# Altium PCB v0.2 PCb.PcbDoc
Units mm, origin at the board's own origin, x right, y up, seen from the top; angles counter-clockwise.
Board outline 61.59 x 36.58 mm, 2 copper layers (Top Layer, Bottom Layer); 41 components, 25 nets, 144 pads, 36 vias.
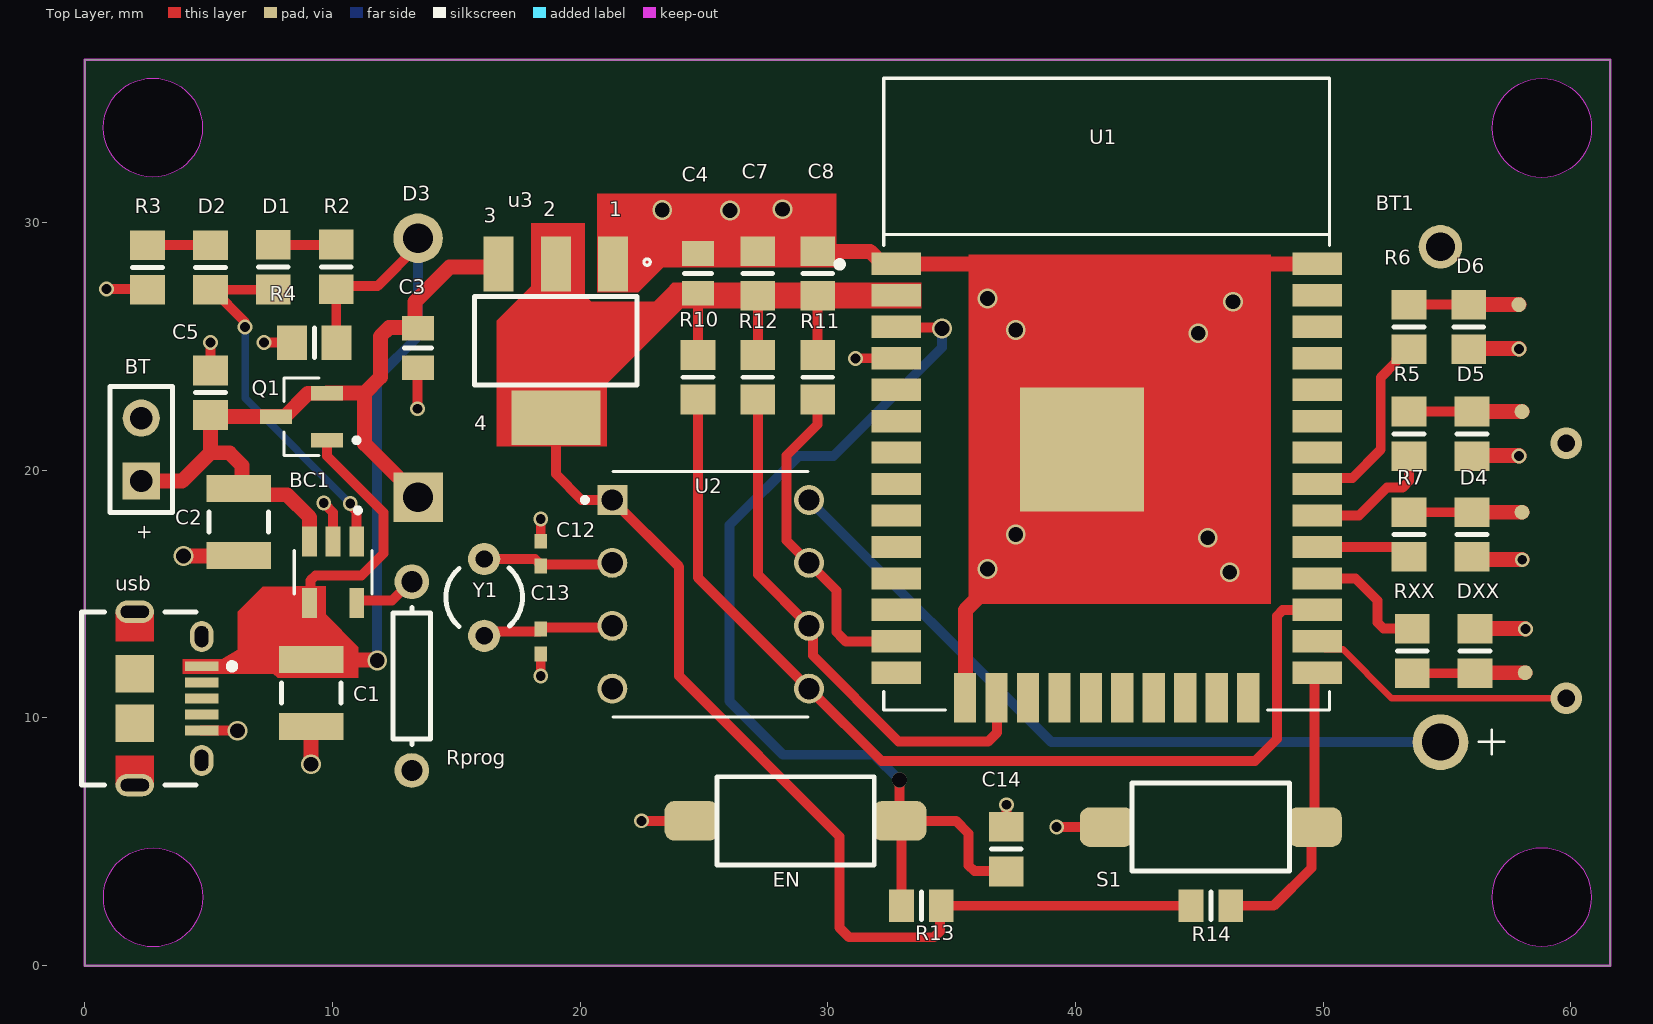
[diagram p0: Top Layer view]
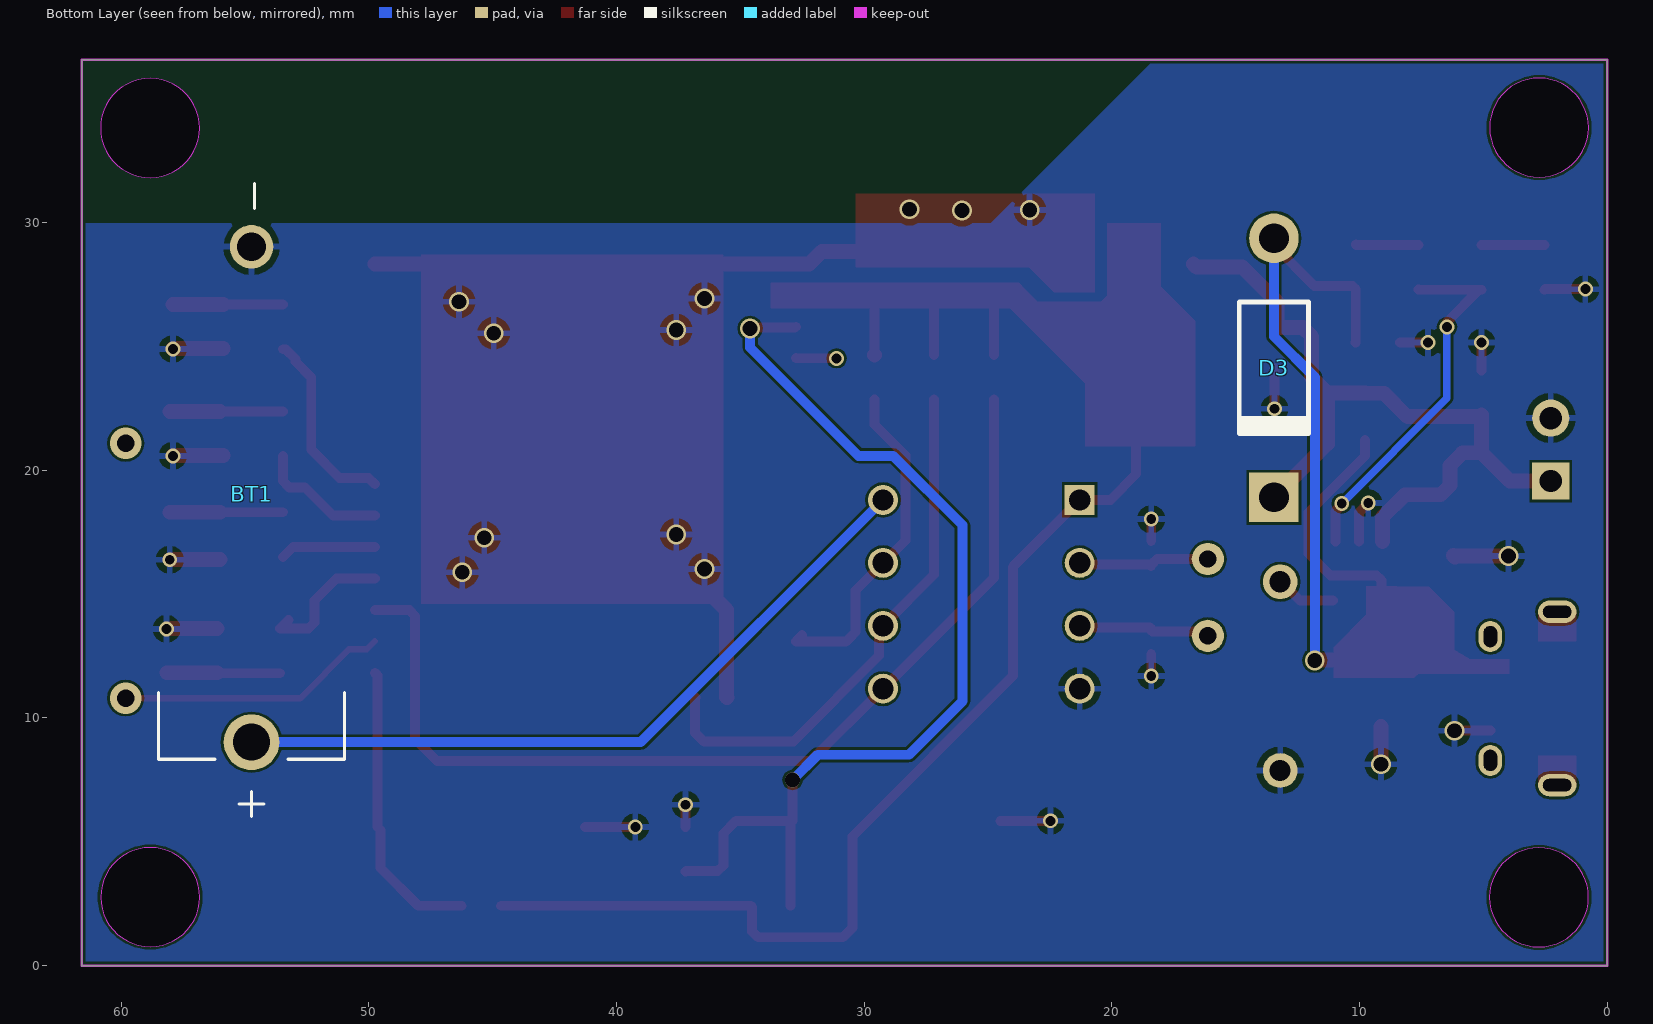
[diagram p1: Bottom Layer view, seen from below]

## Layer stack, top to bottom
Top Solder: solder mask 0.0102, Solder Resist, Dk 3.5
Top Layer: signal copper 0.0356
Dielectric 1: dielectric 0.32, FR-4, Dk 4.8
Bottom Layer: signal copper 0.0356
Bottom Solder: solder mask 0.0102, Solder Resist, Dk 3.5

## Board outline
0,0 0,36.576 61.595,36.576 61.595,0
cut-out: 2.755,31.826 cw(c2.755,33.826) 0.755,33.826 cw(c2.755,33.826) 2.755,35.826 cw(c2.755,33.826) 4.755,33.826 cw(c2.755,33.826)
cut-out: 2.763,0.752 cw(c2.763,2.752) 0.763,2.752 cw(c2.763,2.752) 2.763,4.752 cw(c2.763,2.752) 4.763,2.752 cw(c2.763,2.752)
cut-out: 58.826,0.762 cw(c58.826,2.762) 56.826,2.762 cw(c58.826,2.762) 58.826,4.762 cw(c58.826,2.762) 60.826,2.762 cw(c58.826,2.762)
cut-out: 58.833,31.811 cw(c58.833,33.811) 56.833,33.811 cw(c58.833,33.811) 58.833,35.811 cw(c58.833,33.811) 60.833,33.811 cw(c58.833,33.811)

## Design rules (kind name [scope] priority, off if disabled: settings)
Clearance [All] p1: gap=0.1 ignorepadtopadclearanceinfootprint=FALSE except(0.14: Arc-Arc Arc-Track Track-Track)
PolygonConnect [All] p1: connectstyle=Relief reliefconductorwidth=0.254 reliefentries=4 polygonreliefangle="90 Angle" airgapwidth=0.254
RoutingVias [All] p1: holewidth=0.6 width=0.6 viastyle="Through Hole" minholewidth=0.2 minwidth=0.4 maxholewidth=4 maxwidth=5
SolderMaskExpansion [All] p1: expansion=0.102 istentingtop=FALSE
UnRoutedNet [All] p1: checkbadconnections=TRUE
Width [All] p1: maxlimit=2 minlimit=0.1 preferedwidth=0.4
29 further rules are at their usual default settings.

## Components (designator, comment, footprint, x,y, rotation, side; value= is the part's Value field where it differs from the comment)
BC1 "MCP73811T-420I/OT" *SOT95P280X145-5N 10.033,15.875 r270 top
BT "Battery" BAT-2 2.286,20.828 r90 top
BT1 "BS-7" *BAT_BS-7_BS-7(Primary) 54.737,19.017 r270 bottom locked
C1 "Cap" 14-1210 9.144,11.002 r270 top value=4.7uF
C2 "Cap" 14-1210 6.223,17.907 r90 top value=4.7uF
C3 "Cap" 6-0805_L 13.462,24.93 r90 top value="1uF 25v"
C4 "Cap" 6-0805_L 24.765,27.94 r90 top value="1uF 25 v"
C5 "Cap" 6-0805_N 5.08,23.125 r90 top value=100nF
C7 "Cap" 6-0805_N 27.178,27.94 r90 top value="1 uF 10v"
C8 "Cap" 6-0805_N 29.591,27.94 r90 top value="100uF 6.3v"
C12 "Cap Semi" 0402 18.415,16.629 r270 top value=22pF
C13 "Cap Semi" 0402 18.415,13.081 r90 top value=22pF
C14 "Cap" 6-0805_N 37.211,4.699 r270 top value="1nF 50v"
D1 "LEDK" 6-0805_N 7.62,28.194 r270 top
D2 "LEDY" 6-0805_N 5.08,28.183 r90 top
D3 "D Schottky" DO-41 13.462,24.13 r270 bottom
D4 "LED1" 6-0805_N 56.007,17.399 r270 top
D5 "LED2" 6-0805_N 56.007,21.463 r270 top
D6 "LED3" 6-0805_N 55.88,25.781 r270 top
DXX "LED0" 6-0805_N 56.134,12.7 r90 top
EN "SW-PB" "TE FSMSMTR" 28.702,5.842 r90 top (schematic designator S2)
Q1 "IRLML6402TRPBF" *SOT95P237X112-3N 8.754,22.159 r180 top
R2 "Res1" 6-0805_N 10.16,28.205 r90 top value=470
R3 "Res1" 6-0805_N 2.54,28.183 r90 top value=470
R4 "Res1" 6-0805_N 9.271,25.146 r180 top value=100K
R5 "Res1" 6-0805_N 53.467,21.463 r270 top value=330
R6 "Res1" 6-0805_N 53.467,25.781 r270 top value=330
R7 "Res1" 6-0805_N 53.467,17.399 r270 top value=330
R10 "Res1" 6-0805_N 24.765,23.749 r270 top value=4.7K
R11 "Res1" 6-0805_N 29.591,23.749 r270 top value=4.7K
R12 "Res1" 6-0805_N 27.178,23.749 r270 top value=4.7K
R13 "Res1" 6-0805_L 33.782,2.413 r0 top value=10K
R14 "Res1" 6-0805_L 45.466,2.413 r180 top value=10K
Rprog "Res1" AXIAL-0.3 13.208,11.684 r270 top value=4.7K
RXX "Res1" 6-0805_N 53.594,12.7 r90 top value=330
S1 "SW-PB" "TE FSMSMTR" 45.466,5.588 r270 top
U1 "ESP32-WROOM-32D" *MODULE_ESP32-WROOM-32D 41.259,23.068 r0 top locked
U2 "DS1302Z+" DIP794W47P254L991H457Q8 25.273,14.986 r0 top
u3 "ams1117-3v3" *SOT223 19.025,25.222 r270 top
usb "10118194-0001LF" "usb b micro" 3.374,10.78 r270 top
Y1 "XTAL" R38 16.129,14.859 r180 top

## Footprints (in the part's own frame and the unit in brackets; to place one, negate y for a bottom-side part, rotate by r counter-clockwise, add the part's x,y. Pads: shape width x height; smd on the part's side, far side on the other; paste and mask are expansions set on the pad)
6-0805_L [mm] "Chip Resistor, Body 2.0x1.2mm, IPC High Density"
  rect 1x1.3 smd: 1(-0.8,0) 2(0.8,0)
  silkscreen extent 0,-0.55 0,0.55, body extent -1.07,-0.7 1.07,0.7, height 0.7
6-0805_N [mm] "Chip Resistor, Body 2.0x1.2mm, IPC Medium Density"
  rect 1.2x1.4 smd: 1(-0.9,0) 2(0.9,0)
  silkscreen extent 0,-0.6 0,0.6, body extent -1.07,-0.7 1.07,0.7, height 0.7
14-1210 [mm] "Chip Resistor, Body 3.2x2.5mm, IPC High Density"
  rect 1.1x2.6 smd: 1(-1.35,0) 2(1.35,0)
  silkscreen extent -0.4,-1.2 0.4,1.2, body extent -1.68,-1.32 1.68,1.32, height 0.9
0402 [mm] "Chip Capacitor, Body 1.0x0.5mm, IPC High Density"
  rect 0.6x0.5 smd: 1(-0.5,0) 2(0.5,0)
  body extent -0.55,-0.3 0.55,0.3, height 1.3
*BAT_BS-7_BS-7(Primary) [mm]
  round 1.755 hole 1.17: NEG(-10,0)
  round 2.25 hole 1.5: POS(10,0)
  silkscreen extent -12.56,-3.75 13,3.75
*MODULE_ESP32-WROOM-32D [mm]
  rect 2x0.9 smd: 1(-8.5,5.26) 2(-8.5,3.99) 3(-8.5,2.72) 4(-8.5,1.45) 5(-8.5,0.18) 6(-8.5,-1.09) 7(-8.5,-2.36) 8(-8.5,-3.63) 9(-8.5,-4.9) 10(-8.5,-6.17) 11(-8.5,-7.44) 12(-8.5,-8.71) 13(-8.5,-9.98) 14(-8.5,-11.25) 25(8.5,-11.25) 26(8.5,-9.98) 27(8.5,-8.71) 28(8.5,-7.44) 29(8.5,-6.17) 30(8.5,-4.9) 31(8.5,-3.63) 32(8.5,-2.36) 33(8.5,-1.09) 34(8.5,0.18) 35(8.5,1.45) 36(8.5,2.72) 37(8.5,3.99) 38(8.5,5.26)
  rect 0.9x2 smd: 15(-5.715,-12.25) 16(-4.445,-12.25) 17(-3.175,-12.25) 18(-1.905,-12.25) 19(-0.635,-12.25) 20(0.635,-12.25) 21(1.905,-12.25) 22(3.175,-12.25) 23(4.445,-12.25) 24(5.715,-12.25)
  rect 5x5 smd: 39(-1,-2.24)
  silkscreen extent -10.88,-12.75 9,12.75, body extent -8.98,-12.7 9.02,12.8, height 3.25
*SOT95P237X112-3N [mm]
  rect 1.3x0.59 smd: 1(-1.025,0.95) 2(-1.025,-0.95) 3(1.025,0)
  silkscreen extent -2.32,-1.57 0.7,1.57
*SOT95P280X145-5N [mm]
  rect 1.22x0.6 smd: 1(-1.245,0.95) 2(-1.245,0) 3(-1.245,-0.95) 4(1.245,-0.95) 5(1.245,0.95)
  silkscreen extent -2.6,-1.57 0.88,1.57
*SOT223 [mil]
  rect 88x48 smd: 1(-122,91) 2(-122,0) 3(-122,-91)
  rect 86.61x141.73 smd: 4(122.01,0)
  silkscreen extent -130,-129 70,150
AXIAL-0.3 [mm] "Axial Device, Thru-Hole; 2 Leads; 0.3 in Pin Spacing"
  round 1.4 hole 0.85: 1(-3.81,0) 2(3.81,0)
  silkscreen extent -2.77,-0.76 2.77,0.76
BAT-2 [mm] "Battery; 2 Leads"
  rect 1.5x1.5 hole 0.9: 1(-1.27,0)
  round 1.5 hole 0.9: 2(1.27,0)
  silkscreen extent -2.54,-1.27 2.54,1.27
DIP794W47P254L991H457Q8 [mm]
  rect 1.21x1.21 hole 0.86: 1(-3.97,3.81)
  round 1.21 hole 0.86: 2(-3.97,1.27) 3(-3.97,-1.27) 4(-3.97,-3.81) 5(3.97,-3.81) 6(3.97,-1.27) 7(3.97,1.27) 8(3.97,3.81)
  silkscreen extent -5.17,-4.95 3.94,4.95
DO-41 [mm] "Diode, Axial; Body 5.2 x 2.7 mm (LxDia. max), Lead Dia. 0.86 mm (max)"
  round 2 hole 1.2: 1(-5.23,0)
  rect 2x2 hole 1.2: 2(5.23,0)
  silkscreen extent -2.65,-1.4 2.75,1.4
R38 [mm] "Crystal, Thru-Hole; 2 Leads; Body 3.1 x 8.2 mm (Dia.xH)"
  round 1.3 hole 0.7: 1(0,1.55) 2(0,-1.55)
  silkscreen extent -1.55,-1.19 1.55,1.17
"TE FSMSMTR" [mm]
  rrect50% 1.6x2.19 smd: 1(0,4.191) 2(0,-4.191)
  silkscreen extent -1.78,-3.17 1.78,3.17, body extent -1.75,-4.98 1.75,4.98, height 4.42
"usb b micro" [mm] "SMD, 5-Leads, Body 7x5mm, Pitch 0.65 mm"
  rect 0.4x1.35 smd: 1(-1.3,1.35) 2(-0.65,1.35) 3(0,1.35) 4(0.65,1.35) 5(1.3,1.35)
  oval 1.25x0.95 hole 0.55 slot 0.85 at 0 deg: 6(-2.5,1.35) 7(2.5,1.35)
  oval 0.9x1.55 hole 0.5 slot 1.15 at 90 deg: 8(-3.5,-1.35) 9(3.5,-1.35)
  rect 1.5x1.55 smd: 10(-1,-1.35) 11(1,-1.35)
  Top Layer region: 3.5,-2.125 3.5,-0.575 2.3,-0.575 2.3,-2.125
  Top Layer region: -2.3,-2.125 -2.3,-0.575 -3.5,-0.575 -3.5,-2.125
  silkscreen extent -3.5,-3.5 3.5,2.7, body extent -4.02,-4.03 4.02,1.55, height 2.72

## Part data
BC1: "Charger IC Lithium Ion/Polymer SOT-23-5", Package="SOT-23 Microchip", Availability=Unavailable, MF=Microchip, MP=MCP73811T-420I/OT, Price=None, SnapEDA_Link=https://www.snapeda.com/parts/MCP73811T-420I/OT/Microchip/view-part/53210/?ref=snap
BT: "Multicell Battery", LatestRevisionDate=17-Jul-2002, LatestRevisionNote="Re-released for DXP Platform.", PackageDescription="Battery; 2 Leads", PackageReference=BAT-2, Published=24-Mar-1999, Publisher="Altium Limited"
BT1: "BATTERY HOLDER COIN 20MM PC PIN", Package=None, Availability=Unavailable, MF="MPD _Memory", MP=BS-7, Price=None, SnapEDA_Link=https://www.snapeda.com/parts/BS-7/MPD%20%28Memory%20Protection%20Devices%29/view-part/4219629/?ref=snap
C1 C2 C3 C4 C5 C7 C8 C14: "Capacitor", LatestRevisionDate=17-Jul-2002, LatestRevisionNote="Re-released for DXP Platform.", PackageDescription="Radial Cap, Thru-Hole; 2 Leads; 0.3 in Pin Spacing", PackageReference=RAD-0.3, Published=8-Jun-2000, Publisher="Altium Limited"
C12 C13: "Capacitor (Semiconductor SIM Model)", LatestRevisionDate=29-May-2009, LatestRevisionNote="IPC-7351 Footprint Added.", PackageDescription="Chip Capacitor", PackageReference=C1206, Published=8-Jun-2000, Publisher="Altium Limited"
D1 D2 D4 D5 D6: library part LED0, "Typical INFRARED GaAs LED", LatestRevisionDate=08-Jul-2005, LatestRevisionNote="Mech Layer 1 removed.", PackageDescription="LED; 2 Leads", PackageReference=LED-0, Published=8-Jun-2000, Publisher="Altium Limited"
D3: "Schottky Diode", Code_JEDEC=DO-214-AA, LatestRevisionDate=17-Jul-2002, LatestRevisionNote="Re-released for DXP Platform.", PackageDescription="DO-214-AA/SMB; 2 C-Bend Leads; Body 5.3 x 3.6 mm, inc. leads (LxW)", PackageReference=SMB, Published=8-Jun-2000, Publisher="Altium Limited"
DXX: "Typical INFRARED GaAs LED", LatestRevisionDate=08-Jul-2005, LatestRevisionNote="Mech Layer 1 removed.", PackageDescription="LED; 2 Leads", PackageReference=LED-0, Published=8-Jun-2000, Publisher="Altium Limited"
EN S1: "Switch", LatestRevisionDate=17-Jul-2002, LatestRevisionNote="Re-released for DXP Platform.", PackageDescription="Switch; 2 Leads", PackageReference=SPST-2, Published=24-Mar-1999, Publisher="Altium Limited"
R2 R3 R4 R5 R6 R7 R10 R11 R12 R13 R14 Rprog RXX: "Resistor", LatestRevisionDate=17-Jul-2002, LatestRevisionNote="Re-released for DXP Platform.", PackageDescription="Axial Device, Thru-Hole; 2 Leads; 0.3 in Pin Spacing", PackageReference=AXIAL-0.3, Published=8-Jun-2000, Publisher="Altium Limited"
U1: "Bluetooth, WiFi 802.11b/g/n, Bluetooth v4.2 + EDR, Class 1, 2 and 3 Transceiver Module 2.4GHz ~ 2.5GHz Integrated, Trace Surface Mount", Package="Module Espressif Systems", Availability=Unavailable, MF="Espressif Systems", MP=ESP32-WROOM-32D, Price=None, SnapEDA_Link=https://www.snapeda.com/parts/ESP32-WROOM-32D/Espressif%20Systems/view-part/2768115/?ref=snap
U2: "Real Time Clock _RTC_ IC Clock/Calendar 31B 3-Wire Serial 8-SOIC _0.154, 3.90mm Width_", Package="SOIC-8 Maxim Integrated", Availability=Unavailable, MF="Maxim Integrated", MP=DS1302Z, Price=None, SnapEDA_Link=https://www.snapeda.com/parts/DS1302Z/Maxim%20Integrated/view-part/2748183/?ref=snap
u3: library part LD1117S33CTR, "Linear Voltage Regulator IC 1 Output 800mA SOT-223", Package="SOT-223 STMicroelectronics", Availability=Unavailable, MF=STMicroelectronics, MP=LD1117S33CTR, Price=None, SnapEDA_Link=https://www.snapeda.com/parts/LD1117S33CTR/STMicroelectronics/view-part/46021/?ref=snap
usb: library part "usb b micro", "Micro USB B Type Receptacle, 1.8 A, -55 to 85 degC, 5-Pin SMD, RoHS, Tape and Reel", Manufacturer="Amphenol FCI", Package Description="5-Pin Surface Mount Device, Body 8.05 x 5.53 mm, Pitch 0.65 mm", Package Reference=10118194-0001LF-5, Body Orientation=RightAngle, Datasheet URL=https://datasheet.ciiva.com/26945/getdatasheetpartid-418619-26945695.pdf, Datasheet Version="Rev. A, 10/2011", Gender=RCP, Manufacturer URL=http://www.fci.com/, Mounting=SurfaceMount, Number of Contacts=5, Packaging=CutTape, Pitch=0.65mm, Rad Hard=No, Termination Method=Solder, Type=MicroUSBTypeB
Y1: "Crystal Oscillator", LatestRevisionDate=17-Jul-2002, LatestRevisionNote="Re-released for DXP Platform.", PackageDescription="Crystal, Thru-Hole; 2 Leads; Body 3.1 x 8.2 mm (Dia.xH)", PackageReference=R38, Published=8-Jun-2000, Publisher="Altium Limited"
Q1: SnapEDA_Link=https://www.snapeda.com/parts/IRLML6402TRPBF/Infineon%20Technologies/view-part/523558/?ref=snap

## Free pads (board coordinates)
  round 0.6 smd: 27(57.901,26.681) 27(58.028,18.299) 27(58.028,22.363) 27(58.155,11.822)

## Via types
v1: diameter 0.6, hole 0.4, Top Layer to Bottom Layer, 17 vias
v2: diameter 0.8, hole 0.6, Top Layer to Bottom Layer, 16 vias
v3: diameter 1.27, hole 0.711, Top Layer to Bottom Layer, 2 vias
v4: diameter 0.6, hole 0.6, Top Layer to Bottom Layer, 1 vias

## Nets (pads, with @x,y where several pads share a name; then routed paths per layer and width w, separated by ;. In a path a pad name is that pad's centre, name@x,y a point inside that pad or via, vN(x,y) a via of type N, cw(c..) or ccw(c..) an arc to the next point about the centre after c; other vN are vias at no path point)
3v3: C4.1 C7.1 C8.1 R10.1 R11.1 R12.1 R13.2 R14.2 U1.2 U2.1 u3.2 u3.4 | length 50.1
  Top Layer w0.4: u3.4@19.925,21.223 u3.4 19.025,19.837 20.066,18.796 U2.1 24.003,16.096 24.003,11.684 30.48,5.207 30.48,1.524 30.861,1.143 34.29,1.143 34.524,1.377 34.524,2.355 R13.2 R14.2 ; R10.1 C4.1 ; R12.1 C7.1 ; R11.1 C8.1
  Top Layer w0.6: C8.1 C8.1@29.6,27.049 ; U1.2@32.75,27.049 U1.2
+5: BC1.4 C1.1 D3.1 Q1.1 R2.1 R4.1 usb.1 | length 36.8
  Top Layer w0.4: C1.1@9.083,12.413 C1.1 C1.1@9.16,12.335 ; BC1.4 9.12,14.667 9.12,15.551 9.317,15.748 11.176,15.748 12.065,16.637 12.065,18.288 9.779,20.574 Q1.1 ; R4.1 10.16,25.157 R2.1 10.287,27.432 11.831,27.432 13.462,29.063 D3.1 ; v2@11.795,12.335 v2(11.811,12.319)
  Top Layer w0.6: C1.1@9.16,12.335 v2@11.795,12.335
  Bottom Layer w0.4: v2(11.811,12.319) 11.811,23.749 13.462,25.4 D3.1
B_high: D1.1 R2.2 | length 2.5
  Top Layer w0.4: D1.1 10.149,29.094 R2.2
B_low: D2.2 R3.2 | length 2.5
  Top Layer w0.4: R3.2 D2.2
Buz: U1.26 | length 11
  Top Layer w0.254: U1.26 50.082,12.765 50.801,12.765 51.769,11.797 51.769,11.787 52.76,10.795 v3(59.817,10.795)
CE: R10.2 U1.27 U2.5 | length 40.7
  Top Layer w0.4: R10.2 24.765,15.654 U2.5 32.164,8.255 47.244,8.255 48.133,9.144 48.133,14.117 48.367,14.351 49.752,14.351 U1.27
GND: BC1.2 BT1.NEG BT.2 C1.2 C2.1 C3.1 C4.2 C5.2 C7.2 C8.2 C12.1 C13.1 C14.1 D4.2 D5.2 D6.2 DXX.2 EN.1 R3.1 R4.2 Rprog.2 S1.2 U1.1 U1.15 U1.38 U1.39 U2.4 u3.1 usb.5 | length 43.1
  Top Layer w0.4: v1(0.889,27.305) 2.518,27.305 R3.1 ; usb.5 v2(6.169,9.48) ; C5.2 v1(5.08,25.146) ; v1(7.239,25.146) R4.2 ; v1@9.717,18.604 10.033,18.288 BC1.2 ; v1(13.44,22.479) C3.1@13.44,24.108 ; v1(18.415,11.689) C13.1 ; C12.1 v1(18.415,18.021) ; v1(22.479,5.842) EN.1 ; C14.1 v1(37.211,6.491) ; v1(39.243,5.588) S1.2
  Top Layer w0.6: v2(3.988,16.535) 6.1,16.535 6.151,16.485 C2.1 ; v2(9.144,8.128) C1.2 ; C8.2 29.602,28.829 31.708,28.829 32.209,28.328 U1.1 32.766,28.321 36.957,28.321 ; U1.15 35.56,10.834 35.56,14.351 36.449,15.24 ; 46.355,28.321 49.752,28.321 U1.38 ; D5.2@55.88,20.585 57.901,20.585 v1(57.912,20.574) ; D6.2@55.88,24.903 57.901,24.903 v1(57.912,24.892) ; D4.2@56.007,16.394 58.028,16.394 v1(58.039,16.383) ; DXX.2 58.155,13.6 v1(58.166,13.589)
  other v1: 9.652,18.669
  other v2: 46.228,15.875 36.449,16.002 45.339,17.272 37.592,17.399 44.958,25.527 37.592,25.654 46.355,26.797 36.449,26.924 26.06,30.48 23.317,30.505 28.169,30.531
I/O: R12.2 U1.16 U2.6 | length 21.7
  Top Layer w0.4: R12.2 27.178,15.781 U2.6 29.398,13.561 29.398,12.512 32.861,9.049 36.481,9.049 36.83,9.398 36.83,10.802 U1.16
NetBC1_1: BC1.1 D1.2 D2.1 | length 15.1
  Top Layer w0.4: D2.1 D2.1@5.18,27.283 ; v1(6.477,25.781) 6.458,25.8 6.458,26.005 D2.1@5.18,27.283 ; D1.2 7.609,27.283 D2.1@5.18,27.283 ; v1(10.725,18.65) 10.725,18.596 10.983,18.338 BC1.1
  Bottom Layer w0.3: v1(6.477,25.781) 6.477,22.898 v1(10.725,18.65)
NetBC1_3: BC1.3 BT.1 C2.2 C3.2 C5.1 D3.2 Q1.2 Q1.3 u3.3 | length 32.2
  Top Layer w0.6: BT.1 3.937,19.558 5.08,20.701 ; BC1.3 9.083,18.092 8.168,19.007 6.727,19.007 6.35,19.384 6.35,20.193 5.842,20.701 5.08,20.701 ; D3.2 11.303,21.059 11.303,23.114 ; u3.3 16.586,28.194 14.732,28.194 13.335,26.797 13.335,25.857 13.229,25.751 12.289,25.751 11.938,25.4 11.938,23.749 11.303,23.114 ; 5.08,20.701 C5.1 5.141,22.164 7.724,22.164 Q1.3 8.074,22.159 9.019,23.104 9.774,23.104 Q1.2 9.784,23.114 11.303,23.114
NetBT1_POS: BT1.POS U2.8 | length 29.5
  Bottom Layer w0.4: U2.8 39.022,9.017 BT1.POS
NetC14_2: C14.2 EN.2 R13.1 U1.3 | length 40.5
  Top Layer w0.4: U1.3 32.794,25.753 34.572,25.753 v2(34.608,25.717) ; v4(32.893,7.493) EN.2 ; R13.1 32.982,5.753 EN.2 ; C14.2 37.2,3.81 35.921,3.81 35.687,4.044 35.687,5.334 35.179,5.842 EN.2
  Bottom Layer w0.4: v4(32.893,7.493) 31.877,8.509 28.194,8.509 26.035,10.668 26.035,17.78 28.829,20.574 30.226,20.574 34.608,24.956 v2(34.608,25.717)
NetD4_1: D4.1 pad.27@58.028,18.299 R7.1 | length 4.6
  Top Layer w0.4: R7.1 D4.1
  Top Layer w0.6: D4.1 pad.27@58.028,18.299
NetD5_1: D5.1 pad.27@58.028,22.363 R5.1 | length 4.6
  Top Layer w0.4: R5.1 D5.1
  Top Layer w0.6: D5.1 pad.27@58.028,22.363
NetD6_1: D6.1 pad.27@57.901,26.681 R6.1 | length 4.4
  Top Layer w0.4: R6.1 D6.1
  Top Layer w0.6: D6.1 pad.27@57.901,26.681
NetDXX_1: DXX.1 pad.27@58.155,11.822 RXX.1 | length 4.6
  Top Layer w0.4: RXX.1 DXX.1
  Top Layer w0.6: DXX.1@56.134,11.822 pad.27@58.155,11.822
NetR5_2: R5.2 U1.30 | length 5.3
  Top Layer w0.4: U1.30 51.442,18.168 52.578,19.304 53.213,19.304 53.467,19.558 R5.2
NetR6_2: R6.2 U1.31 | length 7.7
  Top Layer w0.4: U1.31 50.009,19.688 51.184,19.688 52.324,20.828 52.324,23.738 52.967,24.381 52.967,24.481 53.367,24.881 R6.2
NetR7_2: R7.2 U1.29 | length 3.9
  Top Layer w0.4: U1.29 53.068,16.898 R7.2
NetR14_1: R14.1 S1.1 U1.25 | length 11.9
  Top Layer w0.4: R14.1 48.006,2.413 49.53,3.937 49.53,5.461 S1.1 49.657,11.716 U1.25
NetRXX_2: RXX.2 U1.28 | length 5.7
  Top Layer w0.4: U1.28 51.301,15.628 52.197,14.732 52.197,13.843 52.44,13.6 RXX.2 RXX.2@53.243,13.951
Rprog: BC1.5 Rprog.1 | length 2.4
  Top Layer w0.4: BC1.5@11.083,14.732 12.414,14.732 13.176,15.494 Rprog.1
SCLK: R11.2 U1.13 U2.7 | length 13.7
  Top Layer w0.4: R11.2 29.591,21.844 28.338,20.591 28.338,17.161 U2.7 30.353,15.146 30.353,13.462 30.608,13.207 30.727,13.088 U1.13 U1.13@32.509,13.338
x1: C12.2 U2.2 Y1.2 | length 5.4
  Top Layer w0.4: Y1.2 18.185,16.409 18.415,16.179 C12.2@18.415,16.143 ; C12.2 C12.2@18.415,16.143 ; U2.2 21.24,16.192 18.465,16.192 C12.2@18.415,16.143
X2: C13.2 U2.3 Y1.1 | length 5.4
  Top Layer w0.4: Y1.1 16.301,13.481 18.365,13.481 18.415,13.531 C13.2 18.415,13.599 18.465,13.649 21.236,13.649 U2.3
pads on no net: U1.4 U1.5 U1.6 U1.7 U1.8 U1.9 U1.10 U1.11 U1.12 U1.14 U1.17 U1.18 U1.19 U1.20 U1.21 U1.22 U1.23 U1.24 U1.32 U1.33 U1.34 U1.35 U1.36 U1.37 usb.2 usb.3 usb.4 usb.6 usb.7 usb.8 usb.9 usb.10 usb.11
copper on no net: | length 1.6
  Top Layer w0.4: v1(31.115,24.511) 31.119,24.515 32.755,24.515 32.759,24.518
  other v3: 59.817,21.082

## Polygon pours and split planes (outlines as drawn)
GND on Bottom Layer "NONET_L-01_P-001" (solid, pour order 4): 0,36.576 0,0 61.722,0 61.595,0.127 61.595,29.972 24.892,29.972 18.288,36.576

## Keep-outs
Keep-Out Layer:
  the board outline again, w0.1

## Other copper
Top Layer:
  region net GND: 20.701,31.166 20.701,27.178 22.352,27.178 23.368,28.194 30.353,28.194 30.353,31.166
  region net +5: 3.962,11.786 4.47,11.786 7.62,11.786 7.798,11.608 11.049,11.608 11.049,12.852 9.728,14.173 9.728,15.316 8.509,15.316 8.484,15.291 7.188,15.291 6.172,14.275 6.172,12.751 5.537,12.37 5.283,12.37 3.962,12.37
  region net 3v3: 33.782,27.559 33.782,26.543 24.13,26.543 21.082,23.495 21.082,20.955 16.637,20.955 16.637,26.035 18.034,27.432 18.034,29.972 19.431,29.972 19.939,29.972 20.193,29.972 20.193,27.051 20.447,26.797 22.987,26.797 23.495,27.305 23.749,27.559
  region net GND: 35.687,28.702 47.879,28.702 47.879,14.605 35.687,14.605

## Silkscreen, mask and mechanical layers (free items; w line width, h text height)
Top Overlay:
  lines w0.1: 56.287,9.025 57.313,9.025 ; 56.8,8.525 56.8,9.525

## Text inside footprints (layer, text, board x,y; h text height)
BT: Top Overlay "+" at 2.863,17.158 h1 r90
U1: Mechanical 4 "ANTENNA" at 35.534,31.469 h1; Mechanical 4 "ANTENNA" at 35.534,31.469 h1
u3: Top Overlay "2" at 18.517,30.048 h1; Top Overlay "1" at 21.184,30.048 h1; Top Overlay "4" at 15.723,21.412 h1; Top Overlay "3" at 16.104,29.794 h1